# Altium PCB pcb_3170100699.PcbDoc
Units mm, origin at the board's own origin, x right, y up, seen from the top; angles counter-clockwise.
Board outline 300 x 300 mm, 2 copper layers (Top Layer, Bottom Layer); 20 components, 52 nets, 175 pads, 0 vias.
Unrouted connection lines stored in the file: 84.
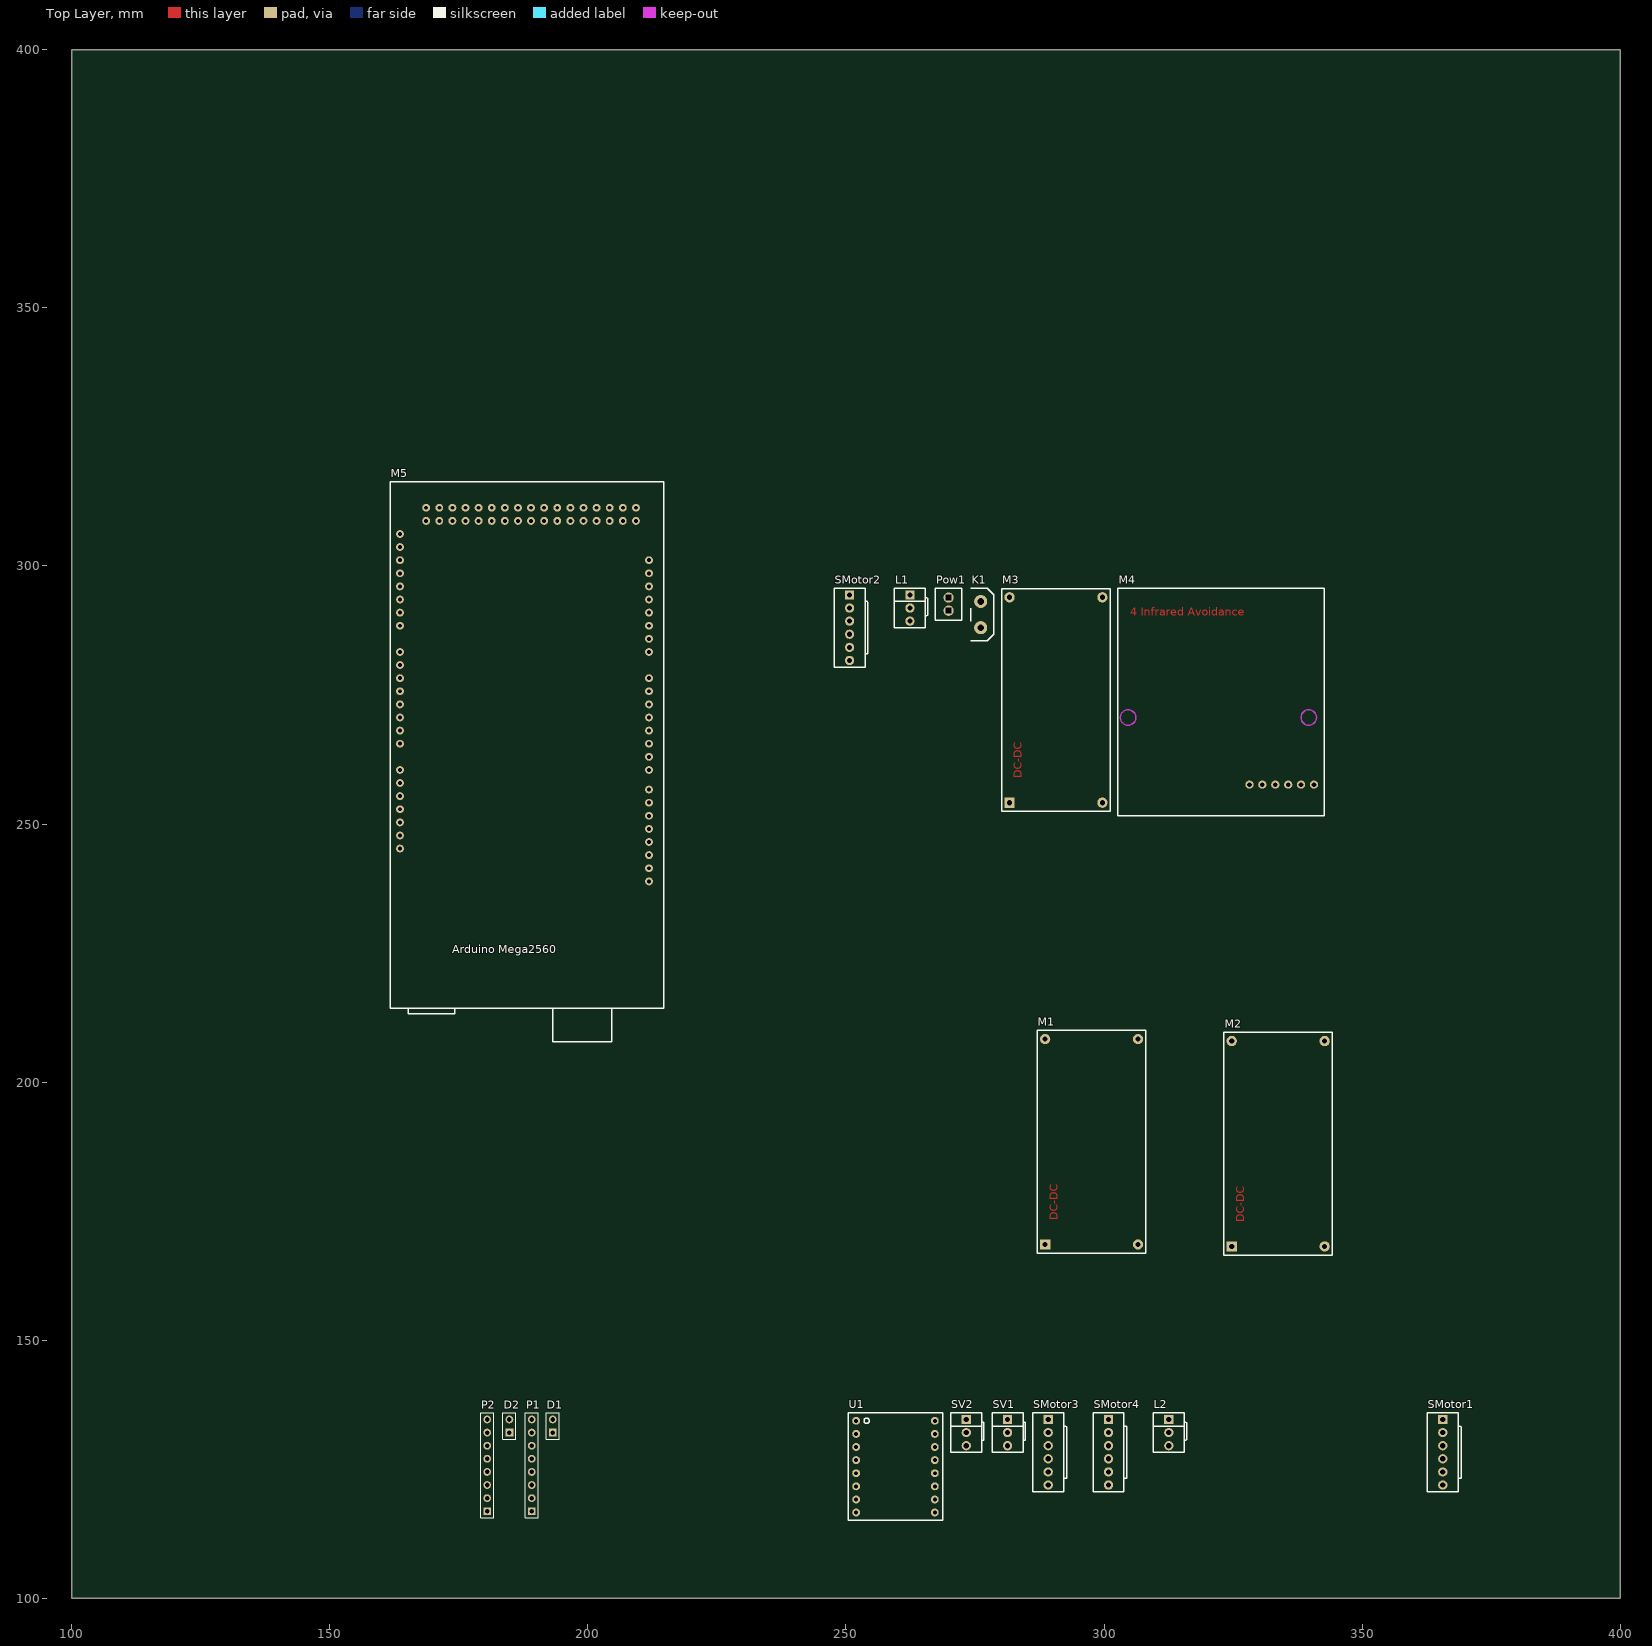
[diagram p0: Top Layer view]
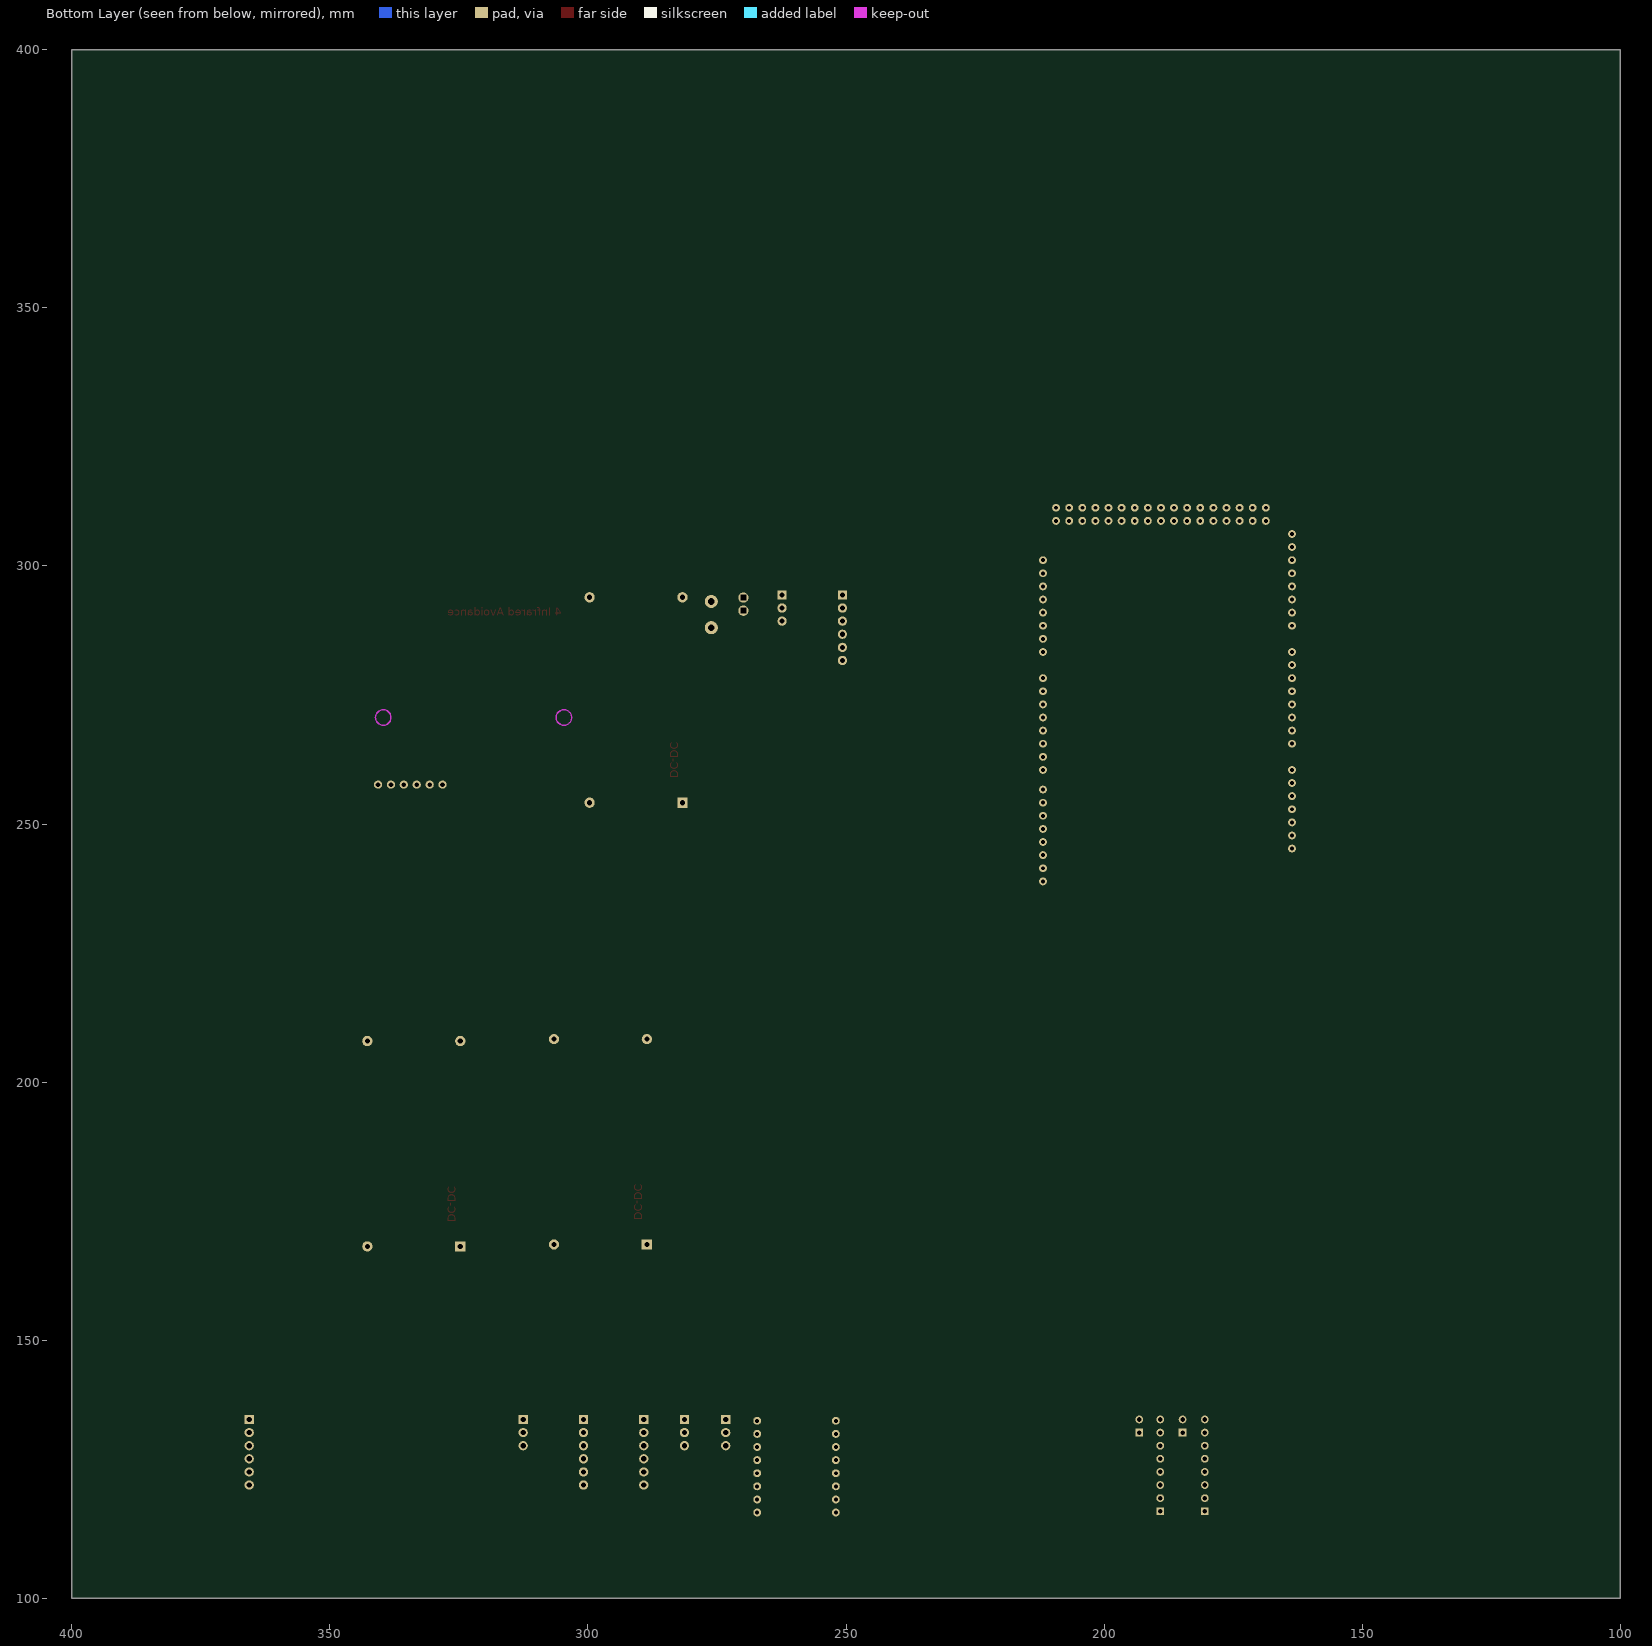
[diagram p1: Bottom Layer view, seen from below]

## Layer stack, top to bottom
Top Solder: solder mask 0.0102, Solder Resist, Dk 3.5
Top Layer: signal copper 0.0356
Dielectric 1: dielectric 0.32, FR-4, Dk 4.8
Bottom Layer: signal copper 0.0356
Bottom Solder: solder mask 0.0102, Solder Resist, Dk 3.5

## Board outline
100,100 100,400 400,400 400,100

## Design rules (kind name [scope] priority, off if disabled: settings)
Clearance [All] p1: gap=0.254
PolygonConnect [All] p1: connectstyle=Relief reliefconductorwidth=0.254 reliefentries=4 polygonreliefangle="90 Angle" airgapwidth=0.254
RoutingVias [All] p1: holewidth=0.711 width=1.27 viastyle="Through Hole" minholewidth=0.711 minwidth=1.27 maxholewidth=0.711 maxwidth=1.27
SolderMaskExpansion [All] p1: expansion=0.102
Width [All] p1: maxlimit=0.254 minlimit=0.254 preferedwidth=0.254
30 further rules are at their usual default settings.

## Components (designator, comment, footprint, x,y, rotation, side; value= is the part's Value field where it differs from the comment)
D1 "DC Motor" HDR1X2 193.167,132.08 r90 top
D2 "DC Motor" HDR1X2 184.785,132.08 r90 top
K1 "key" Header2 276.098,293.116 r0 top
L1 "SERVO" SIP3-1 262.382,294.386 r0 top
L2 "SERVO" SIP3-1 312.547,134.62 r0 top
M1 "LM2596" DC-DC降压 288.578,168.529 r90 top
M2 "LM2596" DC-DC降压 324.739,168.148 r90 top
M3 "LM2596" DC-DC降压 281.686,254.127 r90 top
M4 "4 IR" "4 infrared avoidance - duplicate" 304.673,270.637 r0 top
M5 "Arduino Mega2560" "Arduino Mega2560" 168.656,311.277 r0 top
P1 "TCS230" HDR1X8 189.103,116.84 r90 top
P2 "TCS230" HDR1X8 180.467,116.84 r90 top
Pow1 "POWER" Power 269.875,293.878 r0 top
SMotor1 "SMotor" SIP6-1 365.633,134.62 r0 top
SMotor2 "SMotor" SIP6-1 250.698,294.386 r0 top
SMotor3 "SMotor" SIP6-1 289.179,134.62 r0 top
SMotor4 "SMotor" SIP6-1 300.863,134.62 r0 top
SV1 "SERVO" SIP3-1 281.305,134.62 r0 top
SV2 "SERVO" SIP3-1 273.304,134.62 r0 top
U1 "tb6612" tb6612 251.968,134.366 r0 top

## Footprints (in the part's own frame and the unit in brackets; to place one, negate y for a bottom-side part, rotate by r counter-clockwise, add the part's x,y. Pads: shape width x height; smd on the part's side, far side on the other; paste and mask are expansions set on the pad)
"4 infrared avoidance - duplicate" [mm]
  round 1.6 hole 0.9: 0(36,-13) 1(33.5,-13) 2(31,-13) 3(28.5,-13) 4(26,-13) 5(23.5,-13)
  Keep-Out Layer circle w0.254: c35,0 r1.5
  Keep-Out Layer circle w0.254: c0,0 r1.5
  silkscreen extent -2,-19 38,25
"Arduino Mega2560" [mil]
  round 60 hole 30: 0(1700,-1300) 1(1700,-1400) 2(1700,-1500) 3(1700,-1600) 4(1700,-1700) 5(1700,-1800) 6(1700,-1900) 7(1700,-2000) 8(1700,-2150) 9(1700,-2250) 10(1700,-2350) 11(1700,-2450) 12(1700,-2550) 13(1700,-2650) 14(1700,-1100) 15(1700,-1000) 16(1700,-900) 17(1700,-800) 18(1700,-700) 19(1700,-600) 20(1700,-500) 21(1700,-400) 22(1600,-100) 23(1600,0) 24(1500,-100) 25(1500,0) 26(1400,-100) 27(1400,0) 28(1300,-100) 29(1300,0) 30(1200,-100) 31(1200,0) 32(1100,-100) 33(1100,0) 34(1000,-100) 35(1000,0) 36(900,-100) 37(900,0) 38(800,-100) 39(800,0) 40(700,-100) 41(700,0) 42(600,-100) 43(600,0) 44(500,-100) 45(500,0) 46(400,-100) 47(400,0) 48(300,-100) 49(300,0) 50(200,-100) 51(200,0) 52(100,-100) 53(100,0) 54(0,-100) 55(0,0) 56(-200,-200) 57(-200,-300) 58(-200,-400) 59(-200,-500) 60(-200,-600) 61(-200,-700) 62(-200,-800) 63(-200,-900) 64(-200,-1100) 65(-200,-1200) 66(-200,-1300) 67(-200,-1400) 68(-200,-1500) 69(-200,-1600) 70(-200,-1700) 71(-200,-1800) 72(-200,-2000) 73(-200,-2100) 74(-200,-2200) 75(-200,-2300) 76(-200,-2400) 77(-200,-2500) 78(-200,-2600) 79(1700,-2750) 80(1700,-2850)
  silkscreen extent -276,-4075 1811,197
DC-DC降压 [mm]
  rect 2x2 hole 1: 0(0,0)
  round 2 hole 1: 1(0,-18) 2(39.8,0) 3(39.8,-18)
  silkscreen extent -1.7,-19.5 41.5,1.5
HDR1X2 [mm] "Connector; Header; 2 Position"
  rect 1.5x1.5 hole 0.9: 1(0,0)
  round 1.5 hole 0.9: 2(2.54,0)
  silkscreen extent -1.27,-1.27 3.81,1.27
HDR1X8 [mm] "Connector; Header; 8 Position"
  rect 1.5x1.5 hole 0.9: 1(0,0)
  round 1.5 hole 0.9: 2(2.54,0) 3(5.08,0) 4(7.62,0) 5(10.16,0) 6(12.7,0) 7(15.24,0) 8(17.78,0)
  silkscreen extent -1.27,-1.27 19.05,1.27
Header2 [mm]
  round 2.54 hole 1.27: 1(0,0) 2(0,-5.08)
  silkscreen extent -1.91,-7.62 2.54,2.54
Power [mm]
  round 2 hole 1.1 square: 1(0,0) 2(0,-2.54)
  silkscreen extent -2.54,-4.44 2.54,1.78
SIP3-1 [mm]
  rect 1.8x1.8 hole 1: 1(0,0)
  round 1.8 hole 1: 2(0,-2.54) 3(0,-5.08)
  silkscreen extent -3,-6.35 3.43,1.27
SIP6-1 [mm]
  rect 1.8x1.8 hole 1: 1(0,0)
  round 1.8 hole 1: 2(0,-2.54) 3(0,-5.08) 4(0,-7.62) 5(0,-10.16) 6(0,-12.7)
  silkscreen extent -3,-13.97 3.56,1.27
tb6612 [mil]
  round 60 hole 30: 1(0,0) 2(0,-100) 3(0,-200) 4(0,-300) 5(0,-400) 6(0,-500) 7(0,-600) 8(0,-700) 9(600,-700) 10(600,-600) 11(600,-500) 12(600,-400) 13(600,-300) 14(600,-200) 15(600,-100) 16(600,0)
  silkscreen extent -60,-760 660,60

## Part data
D1 D2: library part "Header 2", "Header, 2-Pin"
P1 P2: library part "Header 8", "Header, 8-Pin"
SMotor1 SMotor2 SMotor3 SMotor4: library part SIP6

## Nets (pads, with @x,y where several pads share a name; then routed paths per layer and width w, separated by ;. In a path a pad name is that pad's centre, name@x,y a point inside that pad or via, vN(x,y) a via of type N, cw(c..) or ccw(c..) an arc to the next point about the centre after c; other vN are vias at no path point)
"5 V": L1.2 L2.2 M3.2 M4.0 M5.75 P1.7 P2.7 U1.2 U1.13
"6 V": M2.2 SV1.2 SV2.2 U1.1
"10 V": M1.2 SMotor1.5 SMotor2.5 SMotor3.5 SMotor4.5
"11.1 V": K1.1 M1.0 M2.0 M3.0
GND: L1.3 L2.3 M1.1 M1.3 M2.1 M2.3 M3.1 M3.3 M4.1 M5.73 P1.8 P2.8 Pow1.2 SMotor1.6 SMotor2.6 SMotor3.6 SMotor4.6 SV1.3 SV2.3 U1.8
NET_1_DCM1: M5.21 U1.14
NET_1_DCM2: M5.18 U1.12
NET_1_M1: M5.54 SMotor1.1
NET_1_M2: M5.46 SMotor2.1
NET_1_M3: M5.38 SMotor3.1
NET_1_M4: M5.30 SMotor4.1
NET_2_DCM1: M5.20 U1.15
NET_2_DCM2: M5.17 U1.11
NET_2_M1: M5.52 SMotor1.2
NET_2_M2: M5.44 SMotor2.2
NET_2_M3: M5.36 SMotor3.2
NET_2_M4: M5.28 SMotor4.2
NET_3_M1: M5.50 SMotor1.3
NET_3_M2: M5.42 SMotor2.3
NET_3_M3: M5.34 SMotor3.3
NET_3_M4: M5.26 SMotor4.3
NET_4_M1: M5.48 SMotor1.4
NET_4_M2: M5.40 SMotor2.4
NET_4_M3: M5.32 SMotor3.4
NET_4_M4: M5.24 SMotor4.4
NET_IR1: M4.2 M5.0
NET_IR2: M4.3 M5.1
NET_IR3: M4.4 M5.2
NET_IR4: M4.5 M5.3
NET_L1: L1.1 M5.5
NET_L2: L2.1 M5.6
NET_LED_1: M5.60 P1.5
NET_LED_2: M5.66 P2.5
NET_OUT_1: M5.61 P1.6
NET_OUT_2: M5.67 P2.6
NET_PWM_DCM1: M5.19 U1.16
NET_PWM_DCM2: M5.16 U1.10
NET_S0_1: M5.56 P1.1
NET_S0_2: M5.62 P2.1
NET_S1_1: M5.57 P1.2
NET_S1_2: M5.63 P2.2
NET_S2_1: M5.58 P1.3
NET_S2_2: M5.64 P2.3
NET_S3_1: M5.59 P1.4
NET_S3_2: M5.65 P2.4
NET_SV1: M5.71 SV1.1
NET_SV2: M5.70 SV2.1
NetD1_1: D1.1 U1.4
NetD1_2: D1.2 U1.5
NetD2_1: D2.1 U1.7
NetD2_2: D2.2 U1.6
NetK1_2: K1.2 Pow1.1
pads on no net: M5.4 M5.7 M5.8 M5.9 M5.10 M5.11 M5.12 M5.13 M5.14 M5.15 M5.22 M5.23 M5.25 M5.27 M5.29 M5.31 M5.33 M5.35 M5.37 M5.39 M5.41 M5.43 M5.45 M5.47 M5.49 M5.51 M5.53 M5.55 M5.68 M5.69 M5.72 M5.74 M5.76 M5.77 M5.78 M5.79 M5.80 U1.3 U1.9

## Silkscreen, mask and mechanical layers (free items; w line width, h text height)
Mechanical 1:
  the board outline again, w0.254

## Text inside footprints (layer, text, board x,y; h text height)
M1: Top Layer "DC-DC" at 290.991,173.228 h1.52 r90
M2: Top Layer "DC-DC" at 327.152,172.847 h1.52 r90
M3: Top Layer "DC-DC" at 284.099,258.826 h1.52 r90
M4: Top Layer "4 Infrared Avoidance" at 305.054,290.322 h1.52